# Altium PCB PCB1.PcbDoc
Units mm, origin at the board's own origin, x right, y up, seen from the top; angles counter-clockwise.
Board outline 61.5 x 59.2 mm, 2 copper layers (Top Layer, Bottom Layer), stack 0.871 mm thick; 38 components, 29 nets, 193 pads, 101 vias.
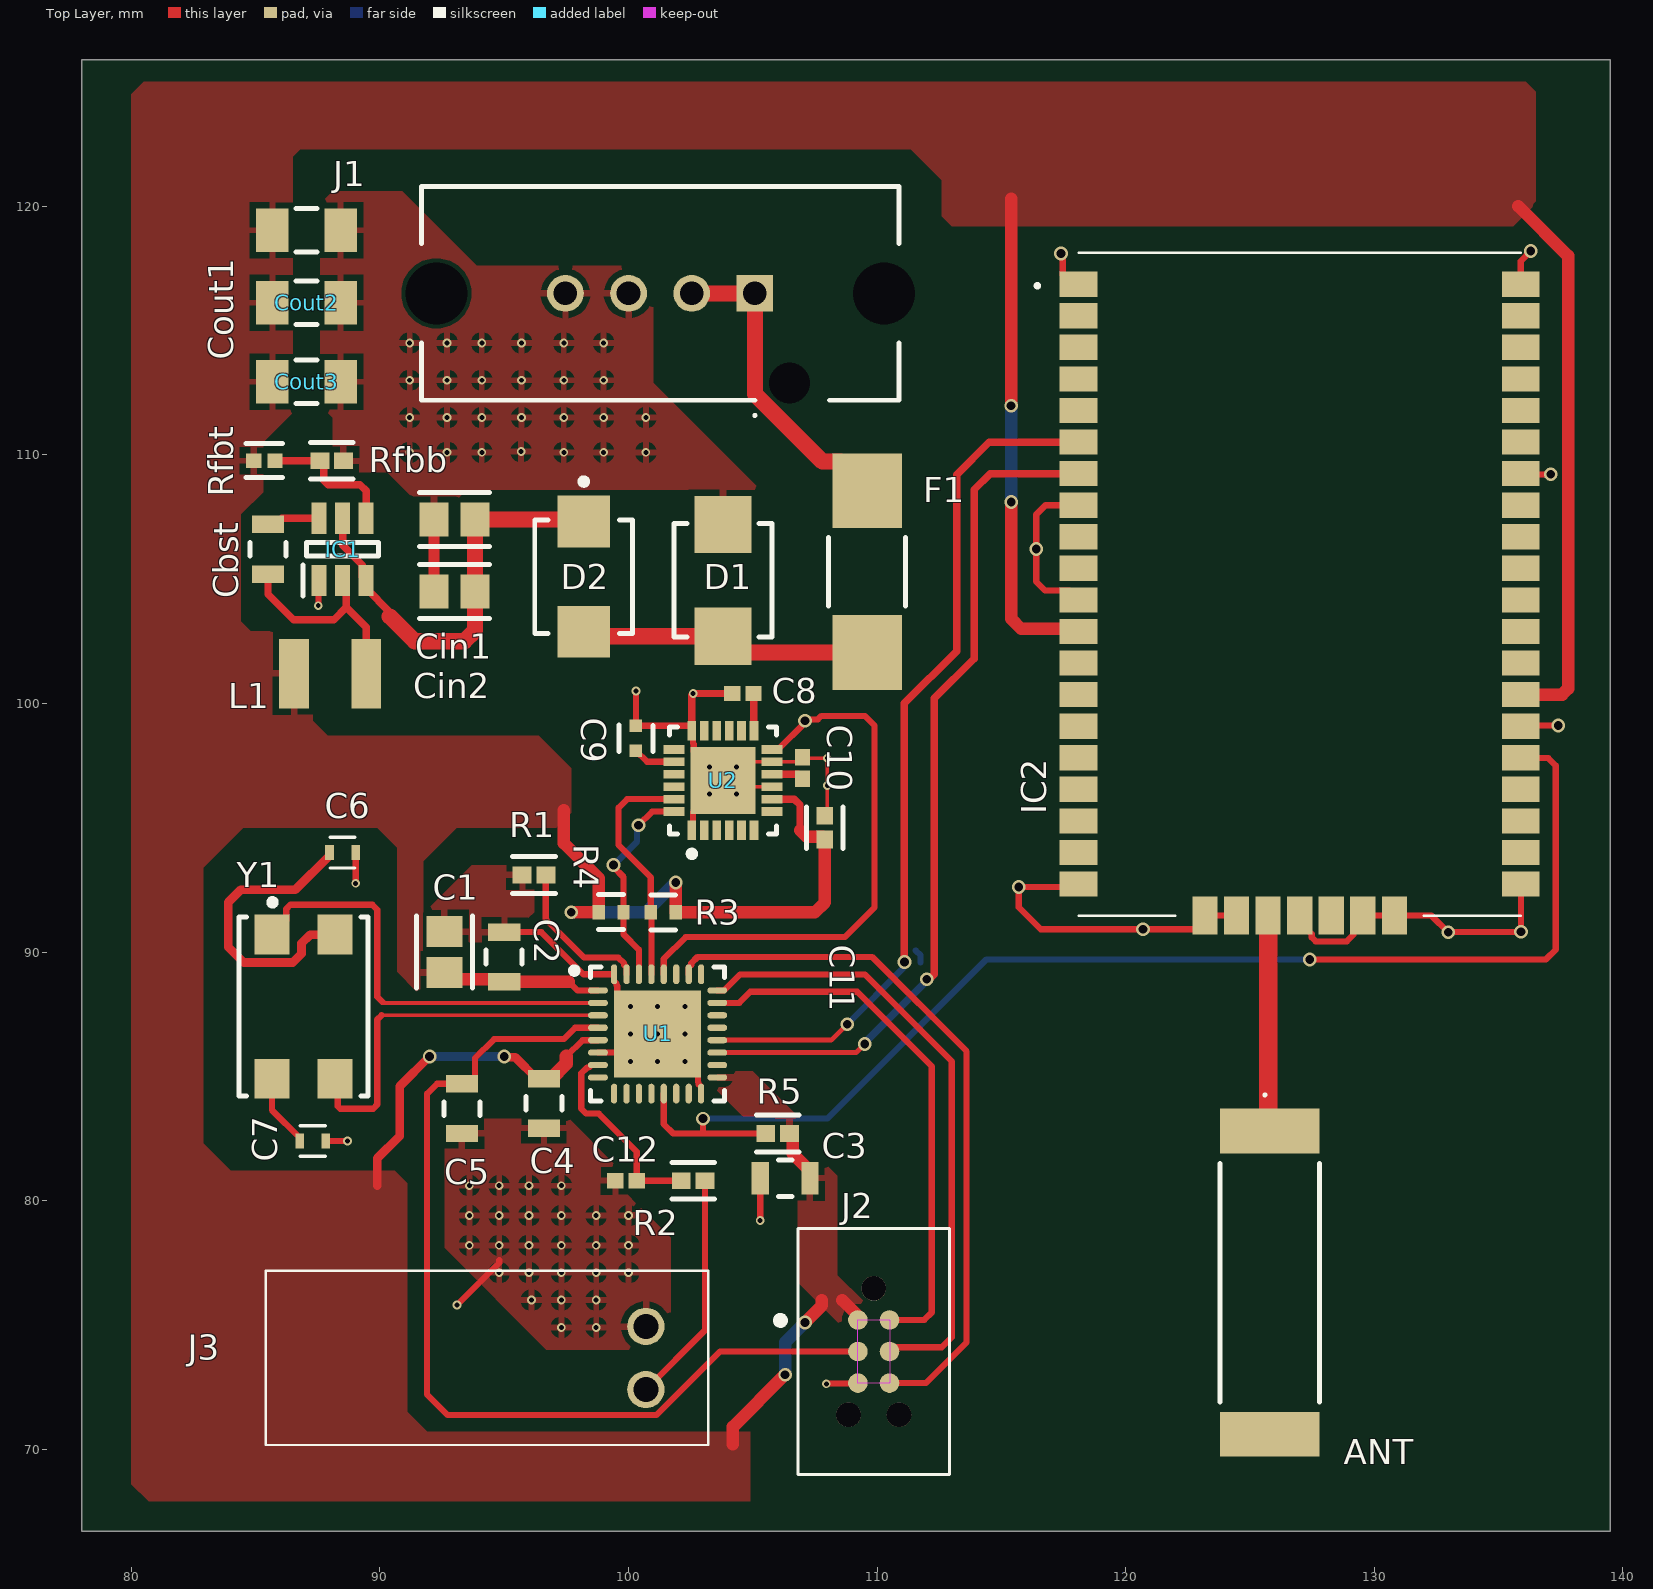
[diagram p0: Top Layer view]
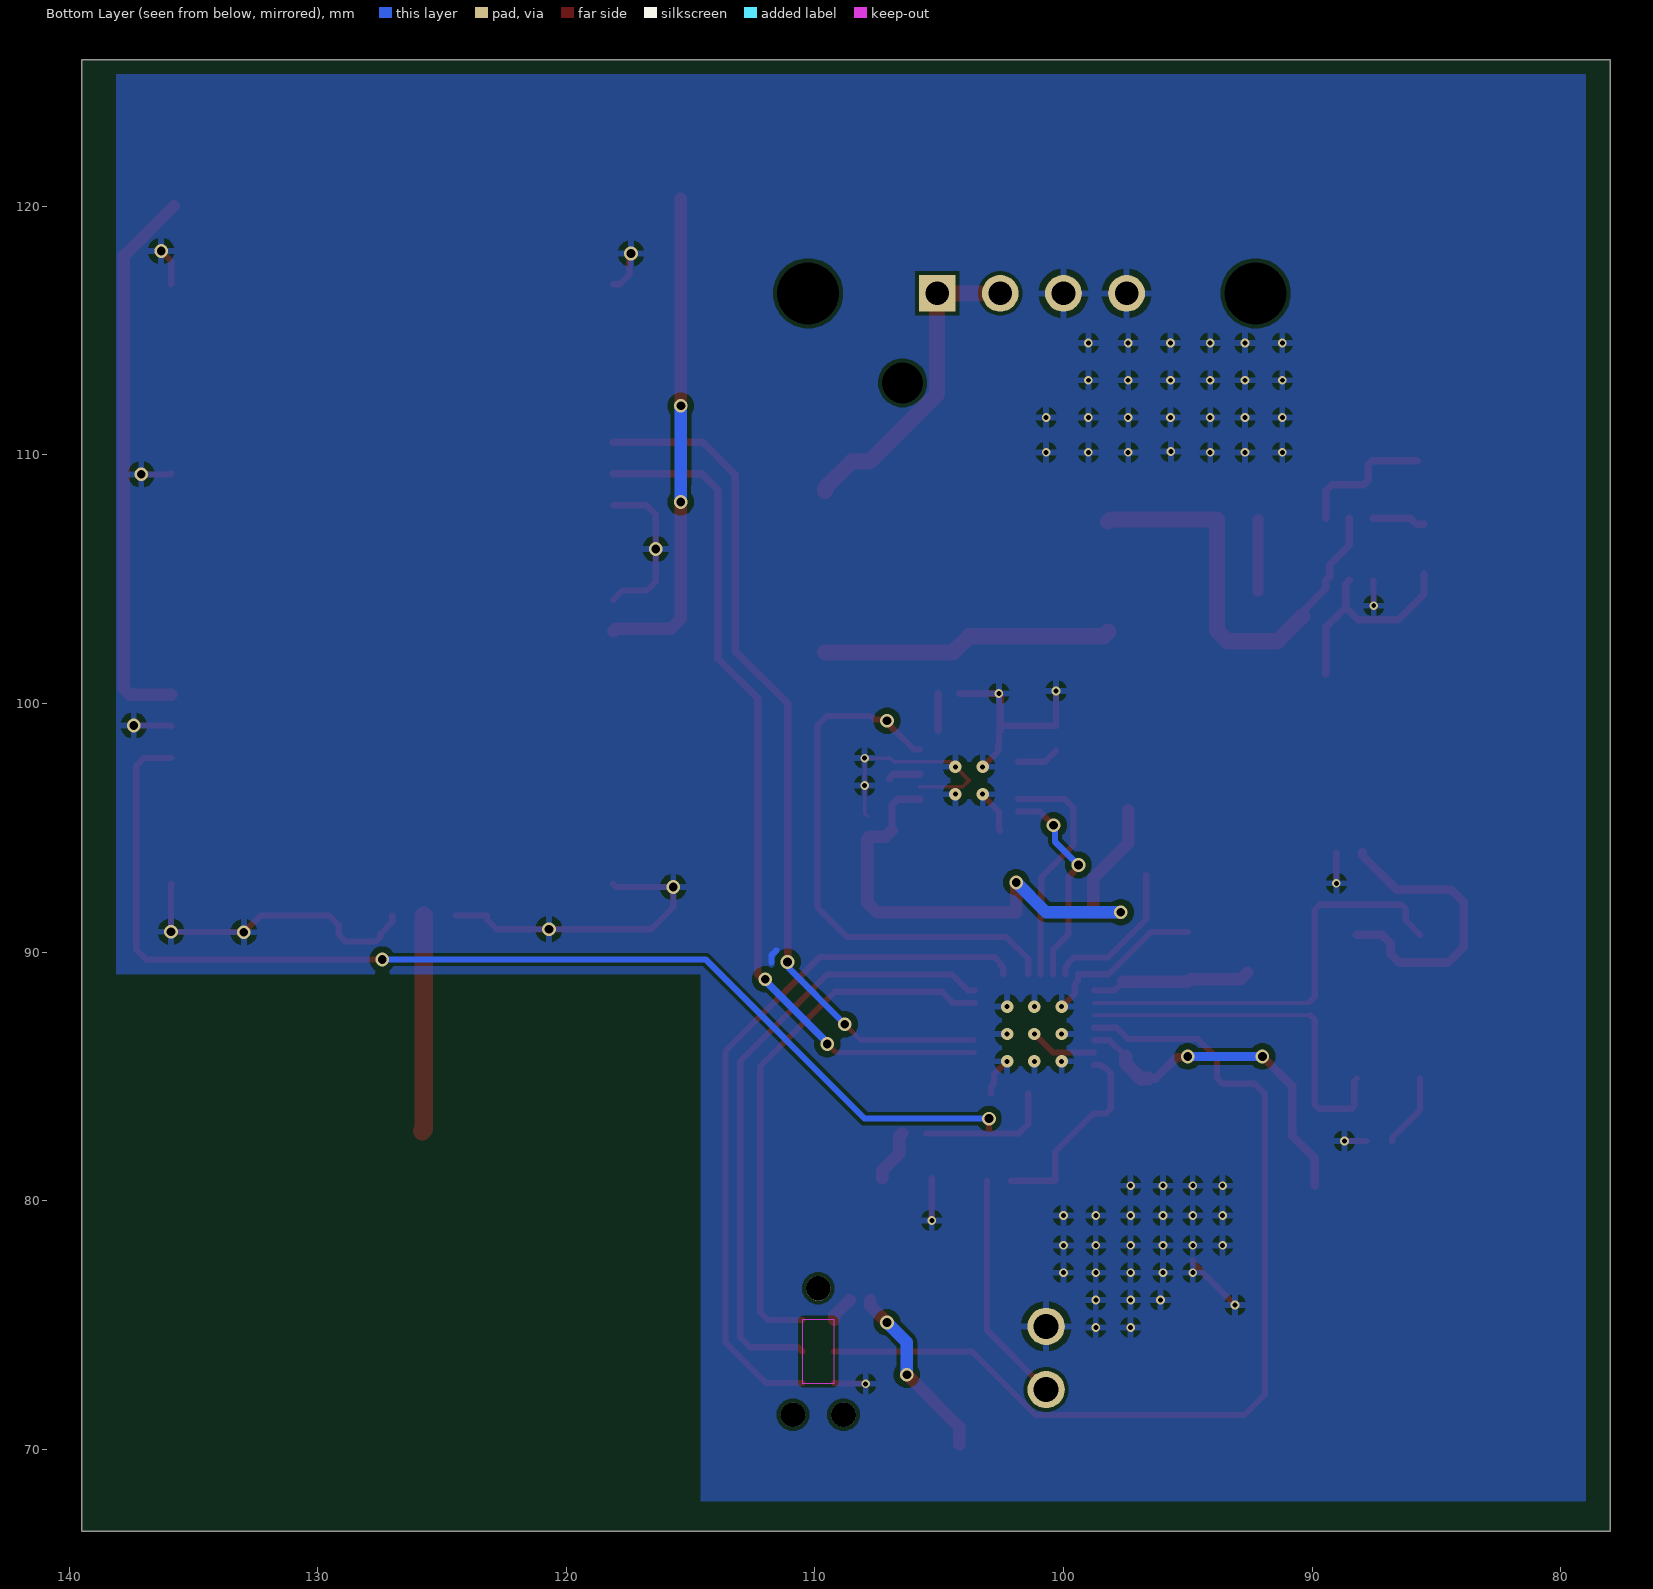
[diagram p1: Bottom Layer view, seen from below]
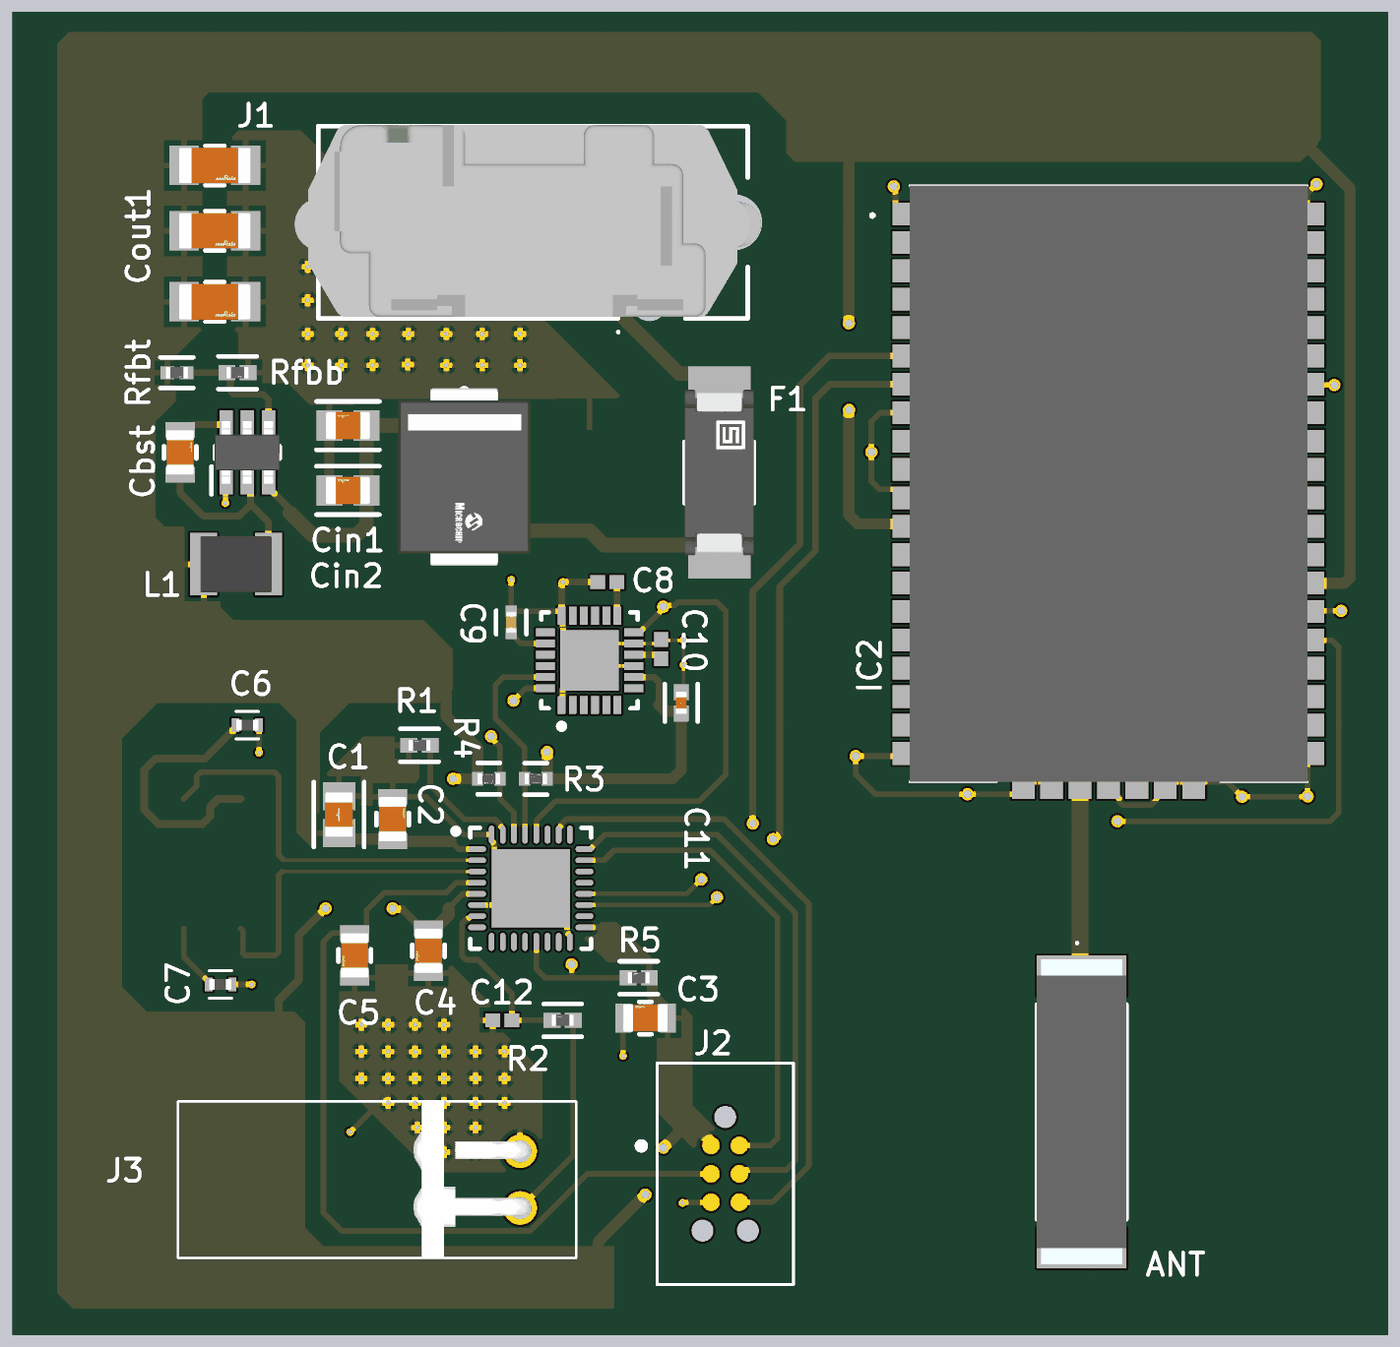
[diagram p2: 3D render of the assembled board from above, using the file's embedded part models]

## Layer stack, top to bottom
Top Solder: solder mask 0.0102, Solder Resist, Dk 3.5
Top Layer: signal copper 0.0356
Dielectric 1: dielectric 0.8, FR-4, Dk 4.5
Bottom Layer: signal copper 0.0356
Bottom Solder: solder mask 0.0102, Solder Resist, Dk 3.5

## Board outline
78,66.7 78,125.9 139.5,125.9 139.5,66.7

## Design rules (kind name [scope] priority, off if disabled: settings)
Clearance Clearance_1 [All] p1: gap=0.15 ignorepadtopadclearanceinfootprint=TRUE except(0.25: Arc-Arc Arc-Track Arc-Via Track-Track Track-Via Via-Via Via-Fill Via-Poly Via-Region)
Clearance [All] p2: gap=0 ignorepadtopadclearanceinfootprint=TRUE except(0.32: Arc-Arc Arc-Track Track-Track)
HoleSize [All] p1: absolutevalues=TRUE maxlimit=6.3 minlimit=0.2 maxpercent=80.000 minpercent=20.000
MinimumSolderMaskSliver [All] p1: minsoldermaskwidth=0.1
PolygonConnect [All] p1: connectstyle=Relief reliefconductorwidth=0.254 reliefentries=4 polygonreliefangle="90 Angle" airgapwidth=0.254
RoutingVias [All] p1: holewidth=0.35 width=0.55 viastyle="Through Hole" minholewidth=0.2 minwidth=0.35 maxholewidth=0.8 maxwidth=1.2
SilkToSolderMaskClearance [IsPad] p1: minsilkscreentomaskgap=0.1 clearancetoexposedcopper=TRUE
SolderMaskExpansion [All] p1: expansion=0.1 istentingtop=FALSE
SupplyNets "Schematic Supply Nets_2" [InNet('GND')] p1: voltage=0.000
SupplyNets "Schematic Supply Nets_1" [InNet('3V3')] p2: voltage=0.000
SupplyNets "Schematic Supply Nets" [InNet('VBAT')] p3: voltage=0.000
UnRoutedNet [All] p1: checkbadconnections=TRUE
Width [All] p1: maxlimit=1.5 minlimit=0.15 preferedwidth=0.25 minimp=50.000000 maximp=50.000000 favimp=50.000000
26 further rules are at their usual default settings.

## Components (designator, comment, footprint, x,y, rotation, side; value= is the part's Value field where it differs from the comment)
ANT "ANT1204F005R0915A" ANT1204F005R0915A 125.8,76.7 r270 top
C1 "2.2 uF" FP-GRM21B-0_2-e0_2_0_7-IPC_B 92.6,90 r90 top
C2 "100 nF" FP-GCE21B-0_3-MFG 95,89.8 r90 top
C3 "100 nF" FP-GCE21B-0_3-MFG 106.3,80.9 r180 top
C4 "100 nF" FP-GCE21B-0_3-MFG 96.6,83.91 r270 top
C5 "100 nF" FP-GCE21B-0_3-MFG 93.3,83.7 r270 top
C6 "CC0402JRNPO9BN240" CAPC1005X55N 88.5,94 r0 top
C7 "24 pF x2" CAPC1005X55N 87.3,82.4 r0 top
C8 "100 nF" CAPC1005X55X30NL05T10 104.6,100.4 r0 top
C9 "2n2 F" FP-CC0402-MFG 100.3,98.6 r90 top value="2.2 nF"
C10 "100 nF" CAPC1005X55X30NL05T10 107,97.4 r270 top
C11 "10 nF" FP-0402-L_1_0_0_05-W_0_5-IPC_A 107.9,95 r90 top
C12 "100 nF" CAPC1005X55X30NL05T10 99.9,80.8 r0 top
Cbst "100 nF 280 mOhm" FP-GCE21B-0_3-MFG 85.5,106.2 r90 top
Cin1 "10 uF 5.85 mOhm x2" FP-GRM21B-0_1-IPC_B 93,107.4 r180 top
Cin2 "10 uF 5.85 mOhm" FP-GRM21B-0_1-IPC_B 93,104.5 r180 top
Cout1 "22 uF 1 mOhm x3" FP-GRM319-0_15-IPC_B 87.049,119.036 r0 top
Cout2 "22uF 1 mOhm" FP-GRM319-0_15-IPC_B 87.049,116.115 r0 top
Cout3 "22uF 1 mOhm" FP-GRM319-0_15-IPC_B 87.049,112.94 r0 top
D1 "TVS" WE-TVSP_DO-214AA_Bidirectional -1166.2,1374.95 r90 top
D2 "Schottky" FP-DO-214BA-MFG 98.2,105.1 r270 top
F1 "Fuse" FP-OMF_63-MFG 109.6,105.3 r270 top
IC1 "TPS563209DDCR" SOT95P280X110-6N 88.5,106.2 r90 top
IC2 "RN2903A-I_RM105" RN2903AIRM105 127,104.8 r180 top
J1 "from battery" 13791657 105.083,116.496 r180 top
J2 "DNP" TAG_TC2030-IDC-NL 109.865,73.93 r270 top
J3 "vibration sensor" 10059401 103.2,74.94 r180 top
L1 "2.2 uH 15 mOhm" WE-PMFI_322512 88,101.2 r180 top
R1 "10 kOhm" FP-AT0402-IPC_A 96.2,93.1 r180 top
R2 "10 kOhm" FP-AT0402-IPC_A 102.6,80.8 r180 top
R3 "2.2k" FP-RT0402-MFG 101.4,91.6 r0 top value=2.2KΩ
R4 "2.2k" FP-RT0402-MFG 99.3,91.6 r180 top value=2.2KΩ
R5 "10 kOhm" FP-AT0402-IPC_A 106,82.7 r180 top
Rfbb "10 kOhm" FP-AT0402-IPC_A 88.065,109.765 r0 top
Rfbt "33.2 kOhm" FP-AF0402-IPC_B 85.35,109.765 r0 top
U1 "STM32F301K6U6" STM-UFQFPN32_L 101.172,86.704 r0 top
U2 "MPU-6050" IS-QFN-24_V 103.8,96.9 r90 top
Y1 "8 MHz" WE-XTAL_12SMX 1356.93,-1182.2 r270 top

## Footprints (in the part's own frame and the unit in brackets; to place one, negate y for a bottom-side part, rotate by r counter-clockwise, add the part's x,y. Pads: shape width x height; smd on the part's side, far side on the other; paste and mask are expansions set on the pad)
10059401 [mm]
  round 1.5 hole 1: 1(2.5,0) 2(2.5,2.54)
  silkscreen extent 0,-2.23 17.8,4.77, body extent 2.1,-2.28 7.28,4.72, height 17.7
13791657 [mm]
  rect 1.478x1.478 hole 0.95: 1(0,0)
  round 1.478 hole 0.95: 2(2.54,0) 3(5.08,0) 4(7.62,0)
  round 1.25 hole 2.5 unplated: MH1(-5.19,0) MH2(12.81,0)
  round 0.825 hole 1.65 unplated: MH3(-1.39,3.6)
  silkscreen extent -5.79,-4.3 13.41,4.96, body extent -6.37,-4.36 14.91,4.24, height 17.41
ANT1204F005R0915A [mm]
  rect 1.8x4 smd: 1(-6.1,0) 2(6.1,0)
  silkscreen extent -7.6,-2 4.8,2, body extent -6.82,-2 6.82,2, height 1.9
CAPC1005X55N [mm]
  rect 0.35x0.6 smd paste+0 mask+0.102: 1(-0.525,0) 2(0.525,0)
  silkscreen extent -0.5,-0.62 0.5,0.62, body extent -0.5,-0.25 0.5,0.25, height 0.55
CAPC1005X55X30NL05T10 [mm] "Chip Capacitor, 2-Leads, Body 1.00x0.50mm, IPC Medium Density"
  rect 0.66x0.62 smd: 1(-0.43,0) 2(0.43,0)
  body extent -0.53,-0.28 0.53,0.27, height 0.55
FP-0402-L_1_0_0_05-W_0_5-IPC_A [mm]
  rect 0.715x0.672 smd paste+0 mask+0: 1(-0.479,0) 2(0.479,0)
  silkscreen extent -0.84,-0.74 0.84,0.74, body extent -1.04,-0.54 1.04,0.54, height 0.25
FP-AF0402-IPC_B [mm]
  rect 0.615x0.572 smd paste+0 mask+0: 1(-0.429,0) 2(0.429,0)
  silkscreen extent -0.74,-0.69 0.74,0.69, body extent -0.89,-0.44 0.89,0.44, height 0.25
FP-AT0402-IPC_A [mm]
  rect 0.76x0.672 smd paste+0 mask+0: 1(-0.476,0) 2(0.476,0)
  silkscreen extent -0.86,-0.74 0.86,0.74, body extent -1.06,-0.54 1.06,0.54, height 0.25
FP-CC0402-MFG [mm]
  rect 0.5x0.5 smd paste+0 mask+0: 1(-0.5,0) 2(0.5,0)
  silkscreen extent -0.53,-0.68 0.53,0.67, body extent -0.87,-0.48 0.87,0.48, height 0.25
FP-DO-214BA-MFG [mm]
  rect 2.08x2.13 smd paste+0 mask+0: 1(-2.215,0) 2(2.215,0)
  silkscreen extent -3.95,-1.97 2.28,1.97, body extent -3.35,-2.07 3.35,2.07, height 0.25
FP-GCE21B-0_3-MFG [mm]
  rect 0.7x1.3 smd paste+0 mask+0: 1(-1,0) 2(1,0)
  silkscreen extent -0.28,-0.72 0.28,0.72, body extent -1.45,-0.82 1.45,0.82, height 0.25
FP-GRM21B-0_1-IPC_B [mm]
  rect 1.158x1.362 smd paste+0 mask+0: 1(-0.827,0) 2(0.827,0)
  silkscreen extent -1.41,-1.08 1.41,1.08, body extent -1.66,-0.93 1.66,0.93, height 0.25
FP-GRM21B-0_2-e0_2_0_7-IPC_B [mm]
  rect 1.255x1.456 smd paste+0 mask+0: 1(-0.826,0) 2(0.826,0)
  silkscreen extent -1.45,-1.13 1.45,1.13, body extent -1.7,-0.98 1.7,0.98, height 0.25
FP-GRM319-0_15-IPC_B [mm]
  rect 1.306x1.758 smd paste+0 mask+0: 1(-1.376,0) 2(1.376,0)
  silkscreen extent -0.42,-0.88 0.42,0.88, body extent -2.28,-1.13 2.28,1.13, height 0.25
FP-OMF_63-MFG [mm]
  rect 3x2.8 smd paste+0 mask+0: 1(-3.25,0) 2(3.25,0)
  silkscreen extent -1.38,-1.55 1.38,1.55, body extent -4.85,-1.65 4.85,1.65, height 0.25
FP-RT0402-MFG [mm]
  rect 0.5x0.6 smd paste+0 mask+0: 1(-0.5,0) 2(0.5,0)
  silkscreen extent -0.5,-0.71 0.5,0.7, body extent -0.85,-0.4 0.85,0.4, height 0.25
IS-QFN-24_V [mm] "QFN, 24-Leads, Body 4x4mm, Pitch 0.5mm, Thermal Pad 2.7x2.6mm"
  rect 0.8x0.35 smd: 1(-2,1.25) 2(-2,0.75) 3(-2,0.25) 4(-2,-0.25) 5(-2,-0.75) 6(-2,-1.25) 13(2,-1.25) 14(2,-0.75) 15(2,-0.25) 16(2,0.25) 17(2,0.75) 18(2,1.25)
  rect 0.35x0.85 smd mask+0.102: 7(-1.25,-1.975) 8(-0.75,-1.975) 9(-0.25,-1.975) 10(0.25,-1.975) 11(0.75,-1.975) 12(1.25,-1.975) 19(1.25,1.975) 20(0.75,1.975) 21(0.25,1.975) 22(-0.25,1.975) 23(-0.75,1.975) 24(-1.25,1.975)
  rect 2.7x2.6 smd: 25(0,0)
  silkscreen extent -3.07,-2.15 2.15,2.15, body extent -2,-2 2,2, height 0.95
RN2903AIRM105 [mil]
  rect 60x40 smd: 1(350,-475) 2(350,-425) 3(350,-375) 4(350,-325) 5(350,-275) 6(350,-225) 7(350,-175) 8(350,-125) 9(350,-75) 10(350,-25) 11(350,25) 12(350,75) 13(350,125) 14(350,175) 15(350,225) 16(350,275) 17(350,325) 18(350,375) 19(350,425) 20(350,475) 28(-350,475) 29(-350,425) 30(-350,375) 31(-350,325) 32(-350,275) 33(-350,225) 34(-350,175) 35(-350,125) 36(-350,75) 37(-350,25) 38(-350,-25) 39(-350,-75) 40(-350,-125) 41(-350,-175) 42(-350,-225) 43(-350,-275) 44(-350,-325) 45(-350,-375) 46(-350,-425) 47(-350,-475)
  rect 40x60 smd: 21(150,525) 22(100,525) 23(50,525) 24(0,525) 25(-50,525) 26(-100,525) 27(-150,525)
  silkscreen extent -350,-525 417,525, body extent -350,-525 350,525, height 135
SOT95P280X110-6N [mm]
  rect 1.25x0.6 smd: 1(-1.25,0.95) 2(-1.25,0) 3(-1.25,-0.95) 4(1.25,-0.95) 5(1.25,0) 6(1.25,0.95)
  silkscreen extent -1.88,-1.45 0.28,1.6, body extent -1.4,-1.45 1.4,1.45, height 0.97
STM-UFQFPN32_L [mm] "QFN, 32-Leads, Body 5.1x5.1mm, Pitch 0.5mm, Thermal Pad 3.5x3.5mm, IPC High Density"
  oval 0.8x0.25 smd: 1(-2.4,1.75) 2(-2.4,1.25) 3(-2.4,0.75) 4(-2.4,0.25) 5(-2.4,-0.25) 6(-2.4,-0.75) 7(-2.4,-1.25) 8(-2.4,-1.75) 17(2.4,-1.75) 18(2.4,-1.25) 19(2.4,-0.75) 20(2.4,-0.25) 21(2.4,0.25) 22(2.4,0.75) 23(2.4,1.25) 24(2.4,1.75)
  oval 0.25x0.8 smd: 9(-1.75,-2.4) 10(-1.25,-2.4) 11(-0.75,-2.4) 12(-0.25,-2.4) 13(0.25,-2.4) 14(0.75,-2.4) 15(1.25,-2.4) 16(1.75,-2.4) 25(1.75,2.4) 26(1.25,2.4) 27(0.75,2.4) 28(0.25,2.4) 29(-0.25,2.4) 30(-0.75,2.4) 31(-1.25,2.4) 32(-1.75,2.4)
  rect 3.5x3.5 smd: 33(0,0)
  silkscreen extent -3.47,-2.7 2.7,2.7, body extent -2.55,-2.55 2.55,2.55, height 0.6
TAG_TC2030-IDC-NL [mil]
  round 30.98 smd paste-39.37: 1(-50,-25) 2(-50,25) 3(0,-25) 4(0,25) 5(50,-25) 6(50,25)
  round 39.02 hole 39.02 unplated: ""(-100,0) ""(100,40) ""(100,-40)
  Keep-Out Layer region: 50,-25.03 -50.06,-25.03 -50.06,25 50,25
  silkscreen extent -195,-154 195,120
WE-PMFI_322512 [mm] "SMT Power Inductor, body 3.20 x 2.50 mm"
  rect 1.2x2.8 smd: 1(-1.45,0) 2(1.45,0)
  body extent -1.6,-1.25 1.6,1.25, height 1.2
WE-TVSP_DO-214AA_Bidirectional [mm] "Power TVS Diode, 2-Leads. body 4.32x3.62mm"
  rect 2.3x2.3 smd: 1(-1272.25,-1270) 2(-1267.75,-1270)
  silkscreen extent -1272.28,-1271.97 -1267.72,-1268.03, body extent -1272.7,-1271.81 -1267.3,-1268.19, height 2.38
WE-XTAL_12SMX [mm] "Quartz Crystal, size 12SMX, body 7.5x5.2mm"
  rect 1.6x1.4 smd: 1(-1272.9,-1271.27) 2(-1267.1,-1271.27) 3(-1267.1,-1268.73) 4(-1272.9,-1268.73)
  silkscreen extent -1274.32,-1272.6 -1266.4,-1267.4, body extent -1273.5,-1272.5 -1266.5,-1267.5, height 1.2

## Part data
ANT: "Antenna", Manufacturer_Name="Yageo Group", Mouser Part Number=603-ANT1204F005R0915, Arrow Part Number=ANT1204F005R0915A, Arrow Price/Stock=https://www.arrow.com/en/products/ant1204f005r0915a/yageo, Datasheet Link=https://eu.mouser.com/datasheet/2/447/datasheet_pulse_915mhz_1204_chip_antenna_type05_an-2903025.pdf, Height=1.8mm, Manufacturer_Part_Number=ANT1204F005R0915A, Mouser Price/Stock=https://www.mouser.co.uk/ProductDetail/PulseLarsen-Antennas/ANT1204F005R0915A?qs=gt1LBUVyoHnk%2Fihas5MohQ%3D%3D
C1: library part CMP-06035-063309-1, "CAP CER 2.2UF 100V X7T 0805"
C2 C3 C4 C5 Cbst: library part CMP-06035-010744-1, "Ceramic Capacitor 100nF ±20% 100V X7R 0805"
C6: "24 pF Â±5% 50V Ceramic Capacitor C0G, NP0 0402 (1005 Metric)", Package="0402 Yageo", Check_prices=https://www.snapeda.com/parts/CC0402JRNPO9BN240/Yageo/view-part/?ref=eda, MF=Yageo, MP=CC0402JRNPO9BN240, SnapEDA_Link=https://www.snapeda.com/parts/CC0402JRNPO9BN240/Yageo/view-part/?ref=snap
C7: library part CC0402JRNPO9BN240, "24 pF Â±5% 50V Ceramic Capacitor C0G, NP0 0402 (1005 Metric)", Package="0402 Yageo", Check_prices=https://www.snapeda.com/parts/CC0402JRNPO9BN240/Yageo/view-part/?ref=eda, MF=Yageo, MP=CC0402JRNPO9BN240, SnapEDA_Link=https://www.snapeda.com/parts/CC0402JRNPO9BN240/Yageo/view-part/?ref=snap
C8 C10 C12: library part CMP-2008-03089-1, Manufacturer=Kemet, Part Number=C0402C104Z8VACTU
C9: library part CMP-03422-001301-1, "CAP CER 2200PF 10V X7R 0402", Capacitance="2.2 nF", Manufacturer=YAGEO, Manufacturer Part Number=CC0402MRX7R6BB222, Package=CC0402, Temperature="-55°C to +125°C", Temperature Characteristic=X7R, Temperature Coefficient=30ppm/°C, Temperature Range High=+125°C, Temperature Range Low=-55°C, Tolerance=0.2, Voltage Rating="10 V", Automotive=No, Automotive Grade=NA, Category=Cap, ComponentLink2Description=Datasheet, ComponentLink2URL=http://www.yageo.com/documents/recent/UPY-GP_NP0_16V-to-50V_16.pdf, Device Class L1="Passive Components", Device Class L2=Capacitors, Device Class L3="Ceramic Capacitors", Digikey Description="CAP CER 2200PF 10V X7R 0402", Footprint Url=http://www.yageo.com/exep/pages/download/literatures/UPY-C_GEN_24.pdf, Height=0.55mm, Ipc Land Pattern Name=CAPC10050X50, Lead Free=Yes, Material=Ceramic, Mouser Description="Multilayer Ceramic Capacitors MLCC - SMD/SMT 2.2nF 10V X7R 20%", Octopart=https://octopart.com/cc0402mrx7r6bb222-yageo-71334383, RoHS=TRUE
C11: library part CMP-14477-001757-2, "None"
Cin1 Cin2: library part CMP-2007-03502-2, "Chip Multilayer Ceramic Capacitors for General Purpose, 0805, 10uF, X6S, 22%, 20%, 10V", Capacitance=10uF, Case Code (Imperial)=0805, Case Code (Metric)=2012, Dielectric=X6S, Max Operating Temperature=105°C, Min Operating Temperature=-55°C, Package Quantity=3000, Tolerance=20%, Voltage Rating=10V, Case/Package=0805, Construction=Flat, Depth=1.25mm, Height=1.25mm, Length=2mm, Mount="Surface Mount", Packaging="Tape and Reel", Radiation Hardening=No, Series=GRM, Termination=SMD/SMT, Thickness=0.053inch, Voltage Rating (DC)=10V, Width=1.25mm
Cout1 Cout2 Cout3: library part CMP-06035-054235-1, "Chip Multilayer Ceramic Capacitors for General Purpose, 1206, 22uF, X5R, 15%, 10%, 16V", Capacitance=22uF, Dielectric=X5R, Tolerance=10%, Voltage Rating (DC)=16V, Length=3.2mm, Thickness=850um, Width=1.6mm
D1: library part CMP-03913-73414981-2, "TVS diode [Würth Elektronik] 824521181 TVS diode", Breakdown Voltage=21.05V, Clamping Voltage=29.2V, Leakage Current=1µA, Max Operating Temperature=150°C, Min Operating Temperature=-65°C, Peak Pulse Power=600W, Reverse Standoff Voltage=18V, Height=2.4mm, Length=4.32mm, Max Breakdown Voltage=21.05V, Number of Pins=2, Packaging="Cut Tape", Polarity=Bidirectional, REACH SVHC=Unknown, RoHS=Compliant, Width=3.62mm
D2: library part CMP-00252-99180384-1, "HSM160JE3/TR13 Schottky 1.0A, 60V, Vf=0.60V Smcj (Do-214Ab) Rohs Compliant: Yes", Average Rectified Current=1A, Capacitance=53pF, Forward Voltage=690mV, Max Forward Surge Current (Ifsm)=50A, Max Junction Temperature (Tj)=175°C, Max Repetitive Reverse Voltage (Vrrm)=60V, Min Operating Temperature=-55°C, Peak Reverse Current=100µA, Element Configuration=Single, Forward Current=1A, Height=3.3mm, Max Operating Temperature=175°C, Max Reverse Voltage (DC)=60V, Mount="Surface Mount", NexarPartId=99180384, Number of Pins=2, Packaging="Tape and Reel", Peak Non-Repetitive Surge Current=50A, Radiation Hardening=No, Reverse Voltage=60V, RoHS=Compliant, Schedule B=8541100080
F1: library part CMP-26293-000004-1, "FUSE BOARD MNT 5A 63VAC/VDC 2SMD", Ambient Temperature Range High=+125°C, Ambient Temperature Range Low=-40°C, Fuse Current=5A, Fuse Voltage Drop=140mV, Manufacturer="Schurter Inc", Manufacturer Part Number=3402.0017.11, Max Fuse Ac Voltage=63V, Package=OMF_63, Automotive=No, Category=Fuse, ComponentLink2Description=Datasheet, ComponentLink2URL=https://www.schurter.com/en/datasheet/typ_OMF_63.pdf, Device Class L1="Circuit Protection", Device Class L2=Fuses, Device Class L3=unset, Digikey Description="FUSE BOARD MNT 5A 63VAC/VDC 2SMD", Fuse Blow Speed=Fast, Fuse I2T=2.9A2Sec, Height=2.6mm, Lead Free=Yes, Max Fuse Dc Voltage=63V, Mouser Description="Surface Mount Fuses OMF 63V 5A", Octopart=https://octopart.com/3402.0017.11-schurter-563471, RoHS=TRUE, Voltage Rating=63V
IC1: library part CMP-031-00007-1, "17 V Input", Manufacturer_Name="Texas Instruments", Mouser Part Number=595-TPS563209DDCR, Arrow Part Number=TPS563209DDCR, Arrow Price/Stock=https://www.arrow.com/en/products/tps563209ddcr/texas-instruments.html?utm_currency=USD&region=nac, Datasheet Link=http://www.ti.com/lit/gpn/tps563209, Design Item ID=TPS563209DDCR, Height=1.1mm, Manufacturer_Part_Number=TPS563209DDCR, Mouser Price/Stock=https://www.mouser.co.uk/ProductDetail/Texas-Instruments/TPS563209DDCR?qs=bT6MOr62zwIer%2FLlyIAhvQ%3D%3D, Source=SamacSys.SchLib
IC2: "Integrated Circuit", Arrow Part Number=RN2903A-I/RM105, Manufacturer_Name=Microchip, Mouser Part Number=579-RN2903A-I/RM105, Arrow Price/Stock=https://www.arrow.com/en/products/rn2903a-irm105/microchip-technology?utm_currency=USD&region=nac, Datasheet Link=http://ww1.microchip.com/downloads/en/DeviceDoc/RN2903-LoRa-Technology-Transceiver-Module-Data-Sheet-DS50002390G.pdf, Height=3.34mm, Manufacturer_Part_Number=RN2903A-I/RM105, Mouser Price/Stock=https://www.mouser.co.uk/ProductDetail/Microchip-Technology/RN2903A-I-RM105?qs=PqoDHHvF648ggy%252BxQbPa3A%3D%3D
J1: library part 1379165-7, "Connector", Manufacturer_Name="TE Connectivity", Mouser Part Number=571-1379165-7, Arrow Part Number=1379165-7, Arrow Price/Stock=https://www.arrow.com/en/products/1379165-7/te-connectivity, Datasheet Link=https://www.mouser.de/datasheet/2/418/6/ENG_CD_1379165_D5-2005008.pdf, Height=18.8mm, Manufacturer_Part_Number=1379165-7, Mouser Price/Stock=https://www.mouser.co.uk/ProductDetail/TE-Connectivity-AMP/1379165-7?qs=6Z%252BHCgJKjncEStSYB7eeFQ%3D%3D
J2: library part CMP-009-000001-1, "CABLE ADAPTER 6 POS", Package=None, Availability=Unavailable, Component Type=Standard, Design Item ID=TC2030-IDC-NL, MP=TC2030-IDC-NL, Pin Count=6, Price=None, Source=TC2030-IDC-NL.SchLib
J3: library part CMP-002-00073-1, "Connector", Arrow Part Number=1005940-1, Manufacturer_Name="TE Connectivity", Mouser Part Number=824-1005940-1, Arrow Price/Stock=https://www.arrow.com/en/products/1005940-1/te-connectivity, Datasheet Link=https://www.te.com/en/product-1005940-1.html, Design Item ID=1005940-1, Height=3mm, Manufacturer_Part_Number=1005940-1, Mouser Price/Stock=https://www.mouser.co.uk/ProductDetail/Measurement-Specialties/1005940-1?qs=nNyf8ckWk3QltpLrvr%2FUIQ%3D%3D, Source=SamacSys.SchLib
L1: library part CMP-03913-162350128-1, "Power Ind, 2.2UH, 4.1A, Shielded, 1210 Rohs Compliant: Yes"
R1 R2 R5 Rfbb: library part CMP-03412-043449-1, "Thin Film Chip Resistors Automotive Grade 10kΩ 0.5% 25ppm/°C 0402", Case Code (Imperial)=0402, Case Code (Metric)=1005, Max Operating Temperature=155°C, Max Power Dissipation=63mW, Min Operating Temperature=-55°C, Ratings=AEC-Q200, Resistance=10kR, Resistor Type="Thin Film", Temperature Coefficient=25ppm/°C, Tolerance=0.5%, Case/Package=0402, Features="Moisture Resistant", Height=0.014inch, Length=0.039inch, Number of Terminations=2, Packaging="Cut Tape", RoHS Compliant=Yes, Series=AT, Width=0.02inch
R3 R4: library part CMP-03412-019720-1, "RES SMD 2.2K OHM 0.1% 1/16W 0402", Manufacturer=Yageo, Manufacturer Part Number=RT0402BRE072K2L, Package=RT0402, Power Rating=0.063W, Resistance=2.2KΩ, Temperature="-55°C to +155°C", Temperature Coefficient="50 ppm/°C", Temperature Range High=+155°C, Temperature Range Low=-55°C, Tolerance=0.001, Voltage Rating=50V, Automotive=No, Category=Res, ComponentLink2Description=Datasheet, ComponentLink2URL=http://www.yageo.com/documents/recent/PYu-RT_1-to-0.01_RoHS_L_9.pdf, Composition="Thin Film", Device Class L1="Passive Components", Device Class L2=Resistors, Device Class L3="Chip SMD Resistors", Digikey Description="RES SMD 2.2K OHM 0.1% 1/16W 0402", Footprint Url=http://www.yageo.com/exep/pages/download/literatures/PYu-R_Mount_10.pdf, Height=0.35mm, Ipc Land Pattern Name=RESC10050X30, Lead Free=Yes, Octopart=https://octopart.com/rt0402bre072k2l-yageo-1445889, RoHS=TRUE, Series=RT
Rfbt: library part CMP-03412-045433-1, "Anti-Sulfurated Chip Resistors Automotive Grade 33.2kΩ 1% 100ppm/°C 0402", Case/Package=0402, Max Operating Temperature=155°C, Max Power Dissipation=63mW, Min Operating Temperature=-55°C, Resistance=33.2kR, Resistor Type="Thick Film", Temperature Coefficient=100ppm/°C, Tolerance=1%, Features="Moisture Resistant", Height=0.015inch, Length=0.039inch, Number of Terminations=2, Packaging="Tape and Reel", RoHS Compliant=Yes, Series=AF, Width=0.02inch
U1: library part CMP-0537-00004-1, "ARM Cortex-M4 32-bit MCU, 32 KB Flash, 16 KB Internal RAM, 24 I/Os, 32-Pin UFQFPN, -40 to 85 degC, Tray", I/Os (High Current)=24, Operating Frequency(F) (Processor speed) (MHz)=72, Package Description="32-Pin Ultra Thin Fine Pitch Quad Flat No-Lead, 5 x 5 x 0.6 mm Body, 0.5 mm Pitch, Exposed Pad 3.5 x 3.5 mm", Package Reference=UFQFPN32, Supply Voltage(Vcc) min (V)=2, ComponentLink1Description="Manufacturer URL", ComponentLink1URL=http://www.st.com/, ComponentLink2Description=Datasheet, ComponentLink2URL=http://www.st.com/st-web-ui/static/active/en/resource/technical/document/datasheet/DM00093332.pdf, Core="ARM Cortex-M4", D/A Converter=1, DatasheetVersion="Rev. 6", FLASH Size (Prog) (kB)=32, Internal RAM Size (kB)=16, Mounting Technology="Surface Mount", Packing=Tray
U2: library part CMP-1753-00002-2, "3-Axis Gyroscope, Accelerometer and a Digital Motion Processor(TM) (DMP), 2.375 to 3.46 V, -40 to 85 degC, 24-Pin QFN, RoHS, Tape and Reel", Manufacturer=InvenSense, Standard Package=5,000, Category=Sensors,Transducers, Datasheet URL=http://datasheet.octopart.com/MPU-6050-InvenSense-datasheet-14421344.pdf, Datasheet Version="Rev. 3.3, 05/2012", Dynamic Catalog=MPU-6000™Series, Family=Multifunction, Featured Product=MPU-60506-Axis,IntegratedI²CSolution, Manufacturer URL=http://www.invensense.com/, Online Catalog=MPU-6000™Series, Other Names="1428-1007-2 / MPU6050", Output Type=Digital, Sensor Type=MotionTracking, Unit PriceUSD=Digital
Y1: library part CMP-03913-116855642-2, "WE-XTAL Quartz Crystal", Frequency=8MHz, Max Operating Temperature=70°C, Min Operating Temperature=-20°C, Height=1.4mm, Length=7mm, Width=5mm

## Via types
v1: diameter 0.35, hole 0.2, Top Layer to Bottom Layer, 62 vias
v2: diameter 0.55, hole 0.35, Top Layer to Bottom Layer, 26 vias
v3: diameter 0.5, hole 0.2, Top Layer to Bottom Layer, 13 vias

## Nets (pads, with @x,y where several pads share a name; then routed paths per layer and width w, separated by ;. In a path a pad name is that pad's centre, name@x,y a point inside that pad or via, vN(x,y) a via of type N, cw(c..) or ccw(c..) an arc to the next point about the centre after c; other vN are vias at no path point)
3V3: C1.1 C2.1 C3.1 C4.1 C11.1 Cout1.1 Cout2.1 Cout3.1 IC2.12 IC2.34 J2.1 L1.2 R3.2 R4.2 R5.1 Rfbt.1 U1.1 U1.5 U1.17 U2.8 | length 96.8
  Top Layer w0.25: 97.5,85.8 98.154,86.454 U1.5 ; 97.6,88.8 97.946,88.454 U1.1
  Top Layer w0.3: U2.8 106.67,96.15 106.9,95.92 106.9,94.9
  Top Layer w0.35: 89.9,80.6 89.9,81.7 90.8,82.6 90.8,84.6 v2(92,85.8) ; v2(95,85.8) 95.038,85.762 95.448,85.762 96.3,84.91 C4.1
  Top Layer w0.5: C1.1 92.874,88.9 94.9,88.9 C2.1 97.6,88.8 ; 97.4,95.7 97.4,94.375 98.8,92.975 R4.2 v2(97.7,91.6) ; v2(101.9,92.8) R3.2 107.5,91.6 107.9,92 C11.1 107.9,94.543 107.814,94.629 107.171,94.629 106.9,94.9 ; 104.2,70.2 104.2,70.9 v2(106.3,73) ; R5.1 106.52,82.7 106.606,82.614 106.606,81.894 107.3,81.2 C3.1 ; v2(107.1,75.1) 107.78,75.78 107.78,76 ; 108.6,76 109.23,75.37 J2.1 ; v2(115.391,111.977) 115.4,111.986 115.4,120.3 ; v2(115.4,108.1) 115.4,103.4 115.8,103 118.005,103 IC2.12 ; 135.8,120 137.8,118 137.8,100.595 137.56,100.355 IC2.34
  Top Layer w0.55: C4.1 96.9,84.91 97.5,85.51 97.5,85.8
  Bottom Layer w0.35: v2(92,85.8) v2(95,85.8)
  Bottom Layer w0.5: v2(97.7,91.6) 100.7,91.6 v2(101.9,92.8) ; v2(106.3,73) 106.3,74.3 v2(107.1,75.1) ; v2(115.391,111.977) 115.391,108.809 115.4,108.8 v2(115.4,108.1)
BOOT0: R1.1 U1.31 | length 6.1
  Top Layer w0.25: R1.1 96.676,91.324 98.221,89.779 99.588,89.779 99.822,89.545 99.822,89.479 99.922,89.379 U1.31
GND: C1.2 C2.2 C3.2 C4.2 C5.2 C6.2 C7.2 C8.1 C9.2 C10.1 C11.2 C12.1 Cin1.2 Cin2.2 Cout1.2 Cout2.2 Cout3.2 D1.2 IC1.1 IC2.1 IC2.8 IC2.11 IC2.20 IC2.21 IC2.22 IC2.24 IC2.26 IC2.27 IC2.28 IC2.33 IC2.41 IC2.47 J1.3 J1.4 J2.5 J3.1 R1.2 Rfbb.2 U1.6 U1.16 U1.32 U1.33 U2.1 U2.9 U2.11 U2.18 U2.25 | length 80
  Top Layer w0.15: U2.9 104.05,96.65 U2.25 v3(104.35,97.45) 104.55,97.65 U2.11 106.82,97.65 C10.1 107.03,97.8 v1(108,97.8) v1(108,96.7) 108,95.579 C11.2
  Top Layer w0.25: v1(87.521,103.932) 87.535,103.947 87.535,104.935 IC1.1 ; C7.2 v1(88.7,82.4) ; v1(89.025,92.765) C6.2 ; v1(93.1,75.8) 94.8,77.5 94.8,77.6 ; C2.2 96.493,90.8 98.189,89.104 U1.32 99.422,88.829 99.522,88.729 99.522,88.663 99.547,88.638 99.547,88.329 v3(100.072,87.804) ; U1.6 100.422,85.954 v3(101.172,86.704) ; v1(100.3,100.5) C9.2 102.5,99.1 U2.18@102.55,99.05 ; v3(102.272,85.604) 102.797,85.079 102.797,84.77 102.822,84.745 102.822,84.679 102.922,84.579 U1.16 ; U2.1 102.6,94.95 102.6,95.65 U2.25@103.275,96.325 ; U2.18 102.6,98.85 102.6,98.386 102.625,98.361 102.625,98.075 v3(103.25,97.45) ; v1(105.3,79.2) C3.2 ; v1(107.957,72.63) 107.972,72.645 108.982,72.645 108.997,72.66 J2.5 ; v2(117.4,118.1) 117.4,118.073 117.473,118 117.473,117.248 117.856,116.865 IC2.1 ; IC2.20 117.989,92.614 v2(115.7,92.614) 115.7,91.8 116.586,90.914 v2(120.7,90.914) 122.807,90.914 123.19,91.297 IC2.21 IC2.22 ; IC2.11 117.727,104.548 116.752,104.548 116.4,104.9 v2(116.4,106.214) 116.4,107.6 116.775,107.975 IC2.8 ; IC2.24 127,91.211 127.487,90.724 127.487,90.589 127.648,90.428 128.892,90.428 129.157,90.693 129.157,91.082 IC2.26 IC2.27 132.302,91.465 v2(132.971,90.796) 132.98,90.805 135.891,90.805 v2(135.9,90.814) 135.9,92.725 IC2.28 ; IC2.33 135.919,99.114 v2(137.4,99.114) ; IC2.41 135.921,109.214 v2(137.1,109.214) ; IC2.47 135.89,117.79 v2(136.3,118.2)
  Top Layer w0.3: U2.18 102.55,99.05 102.55,100.336 102.6,100.386 v1(102.6,100.4) C8.1
  Top Layer w0.45: Cin2.2 Cin1.2
  Bottom Layer w0.25: 111.56,90.06 111.75,89.869 111.75,89.589
  other v1: 97.3,74.9 98.7,74.9 96.1,76 97.3,76 98.7,76 94.8,77.1 96,77.1 97.3,77.1 98.7,77.1 100,77.1 93.6,78.2 94.8,78.2 96,78.2 97.3,78.2 98.7,78.2 100,78.2 93.6,79.4 94.8,79.4 96,79.4 97.3,79.4 98.7,79.4 100,79.4 93.6,80.6 94.8,80.6 96,80.6 97.3,80.6 91.2,110.1 92.7,110.1 94.1,110.1 97.4,110.1 99,110.1 100.7,110.1 95.682,110.131 91.2,111.5 92.7,111.5 94.1,111.5 95.7,111.5 97.4,111.5 99,111.5 100.7,111.5 91.2,113 92.7,113 94.1,113 95.7,113 97.4,113 99,113 91.2,114.5 92.7,114.5 94.1,114.5 95.7,114.5 97.4,114.5 99,114.5
  other v3: 100.072,85.604 101.172,85.604 100.072,86.704 102.272,86.704 101.172,87.804 102.272,87.804 103.25,96.35 104.35,96.35
IMU_CPOUT: C9.1 U2.20 | length 1.7
  Top Layer w0.25: C9.1 100.75,97.65 U2.20
IMU_INT: U1.28 U2.12 | length 22.2
  Top Layer w0.25: U1.28 101.422,89.722 102.3,90.6 108.7,90.6 109.9,91.8 109.9,99.1 109.5,99.5 107.761,99.5 107.619,99.357 107.157,99.357 v2(107.1,99.3) 107.1,99.225 106.025,98.15 U2.12
IMU_REGOUT: C10.2 U2.10 | length 1.3
  Top Layer w0.3: U2.10 106.84,97.15 107,96.99 C10.2
IMU_SCL: R3.1 U1.29 U2.23 | length 9.6
  Top Layer w0.25: U1.29 100.922,91.578 R3.1 100.9,93 99.6,94.3 99.6,95.8 99.95,96.15 U2.23
IMU_SDA: R4.1 U1.30 U2.24 | length 8.5
  Top Layer w0.25: v2(99.4,93.5) 99.4,93.419 99.8,93.019 R4.1 99.8,90.713 100.422,90.091 U1.30 ; v2(100.4,95.1) 100.95,95.65 U2.24
  Bottom Layer w0.25: v2(99.4,93.5) 100.343,94.443 100.343,95.043 v2(100.4,95.1)
IMU_VDD: C8.2 U2.13 | length 1.5
  Top Layer w0.3: U2.13@105.03,98.92 C8.2
MCU_ADC: C12.2 R2.2 U1.7 | length 8.1
  Top Layer w0.25: U1.7 98.497,85.454 98.397,85.354 98.331,85.354 98.097,85.12 98.097,83.703 98.3,83.5 98.8,83.5 100.33,81.97 C12.2 R2.2
MCU_OSC1: U1.2 Y1.1 | length 17.6
  Top Layer w0.15: 90.1,88 90.146,87.954 U1.2
  Top Layer w0.254: Y1.1 86.233,91.273 86.233,91.732 86.401,91.9 89.7,91.9 89.9,91.7 89.9,88.2 90.1,88
MCU_OSC2: U1.3 Y1.3 | length 15.2
  Top Layer w0.15: 90.068,87.454 U1.3
  Top Layer w0.254: Y1.3 88.301,84.799 88.301,83.799 88.4,83.7 89.732,83.7 89.9,83.868 89.9,87.286 90.068,87.454
NetCbst_2: Cbst.2 IC1.6 | length 2.2
  Top Layer w0.3: Cbst.2 85.8,107.2 86.05,107.45 IC1.6
NRST: C5.1 J2.3 U1.4 | length 39.3
  Top Layer w0.25: U1.4 97.854,86.954 97.4,86.5 94.6,86.5 93.825,85.725 93.825,84.925 93.6,84.7 C5.1 92.3,84.7 91.9,84.3 91.9,72.2 92.725,71.375 101.125,71.375 103.68,73.93 J2.3
OSC_CAP1: C7.1 Y1.2 | length 3
  Top Layer w0.25: Y1.2 85.66,83.64 86.775,82.525 C7.1
OSC_CAP2: C6.1 Y1.4 | length 12
  Top Layer w0.35: C6.1 87.975,93.875 86.6,92.5 84.4,92.5 83.9,92 83.9,90.2 84.525,89.575 86.495,89.575 86.847,89.928 86.847,90.347 87.2,90.7 Y1.4
RF_RX: IC2.7 U1.19 | length 34.7
  Top Layer w0.2: U1.19 109.154,85.954 v2(109.5,86.3)
  Top Layer w0.3: v2(112,88.9) 112.1,88.9 112.3,89.1 112.3,100.2 113.9,101.8 113.9,108.6 114.545,109.245 IC2.7
  Bottom Layer w0.3: v2(109.5,86.3) 109.5,86.35 112,88.85 v2(112,88.9)
RF_TX: IC2.6 U1.20 | length 34.9
  Top Layer w0.2: U1.20 108.154,86.454 v2(108.8,87.1)
  Top Layer w0.3: v2(111.1,89.6) 111.1,100 113.2,102.1 113.2,109.2 114.515,110.515 IC2.6
  Bottom Layer w0.25: v2(108.8,87.1) 111.043,89.343 111.043,89.543 v2(111.1,89.6)
SW: Cbst.1 IC1.2 L1.1 | length 8.7
  Top Layer w0.3: Cbst.1 85.5,104.4 86.543,103.357 88.137,103.357 88.65,103.87 ; IC1.2 88.65,104.8 88.65,103.87 ; L1.1 89.45,103.07 88.65,103.87
SWCLK: J2.4 U1.24 | length 25
  Top Layer w0.25: U1.24 103.847,88.454 104.493,89.1 109.5,89.1 113,85.6 113,74.5 112.605,74.105 110.675,74.105 J2.4
SWDIO: J2.2 U1.23 | length 21.8
  Top Layer w0.25: U1.23 104.454,87.954 104.9,88.4 109.2,88.4 112.2,85.4 112.2,75.5 111.9,75.2 J2.2
SWO: J2.6 U1.26 | length 28.7
  Top Layer w0.25: U1.26 102.422,89.379 102.522,89.479 102.522,89.545 102.777,89.8 109.8,89.8 113.6,86 113.6,74.3 111.96,72.66 J2.6
TRAN_RESET: IC2.32 R5.2 U1.13 | length 52.2
  Top Layer w0.25: U1.13 101.422,83.078 101.8,82.7 103,82.7 ; v2(103,83.3) 103,82.7 ; R5.2@105.48,82.7 R5.2 103,82.7 ; v2(127.4,89.7) 136.9,89.7 137.3,90.1 137.3,97.5 137,97.8 135.905,97.8 IC2.32
  Bottom Layer w0.25: v2(103,83.3) 108,83.3 114.4,89.7 v2(127.4,89.7)
TRANS_ANT: ANT.1 IC2.23 | length 8.7
  Top Layer w0.75: IC2.23 125.73,82.87 ANT.1
V_TVS: D1.1 D2.2 F1.2 | length 11.7
  Top Layer w0.65: D2.2 98.385,102.7 D1.1 104.45,102.05 F1.2
VBAT: F1.1 J1.1 J1.2 | length 12.8
  Top Layer w0.65: J1.2 J1.1 105.083,112.448 107.806,109.725 108.525,109.725 109.6,108.65 F1.1
VFB: IC1.4 Rfbb.1 Rfbt.2 | length 5.6
  Top Layer w0.3: Rfbt.2 Rfbb.1 87.741,109.613 87.741,108.982 87.923,108.8 89.2,108.8 89.45,108.55 IC1.4
VIB: J3.2 R2.1 | length 9.4
  Top Layer w0.25: J3.2 103.076,74.776 R2.1
Vin: Cin1.1 Cin2.1 D2.1 IC1.3 IC1.5 | length 17.6
  Top Layer w0.3: IC1.5 88.5,106.355 89.3,105.555 89.3,105.1 IC1.3 89.45,104.625 90.4,103.675 90.4,103.5
  Top Layer w0.65: 90.4,103.5 91.4,102.5 93.4,102.5 93.827,102.927 Cin2.1 Cin1.1 98.115,107.4 D2.1
pads on no net: ANT.2 IC2.2 IC2.3 IC2.4 IC2.5 IC2.9 IC2.10 IC2.13 IC2.14 IC2.15 IC2.16 IC2.17 IC2.18 IC2.19 IC2.25 IC2.29 IC2.30 IC2.31 IC2.35 IC2.36 IC2.37 IC2.38 IC2.39 IC2.40 IC2.42 IC2.43 IC2.44 IC2.45 IC2.46 J1.MH1 J1.MH2 J1.MH3 J2. U1.8 U1.9 U1.10 U1.11 U1.12 U1.14 U1.15 U1.18 U1.21 U1.22 U1.25 U1.27 U2.2 U2.3 U2.4 U2.5 U2.6 U2.7 U2.14 U2.15 U2.16 U2.17 U2.19 U2.21 U2.22

## Polygon pours and split planes (outlines as drawn)
3V3 on Top Layer "3V3_L01_P009" (solid, pour order 9): 111.35,122.3 112.6,121.05 112.6,119.6 113,119.2 135.6,119.2 136.5,120.1 136.4,120.1 136.5,120.2 136.5,122.9 136.5,124.6 136.1,125 80.5,125 80,124.5 80,68.6 80.7,67.9 104.9,67.9 104.9,70.7 91.9,70.7 91.093,71.507 91.093,80.707 90.6,81.2 84,81.2 82.9,82.3 82.9,93.4 84.5,95 89.9,95 90.7,94.2 90.7,89.2 91.6,88.3 95.6,88.3 95.8,88.5 95.8,89.1 95.7,89.2 94.6,89.2 93.9,89.9 92,89.9 91.75,90.15 91.75,93.65 93.1,95 97.1,95 97.7,95.6 97.7,97.4 96.4,98.7 87.9,98.7 87.3,99.3 87.3,102.7 87.1,102.9 84.8,102.9 84.4,103.3 84.4,107.6 85.3,108.5 85.3,110.5 86.5,111.7 86.5,122 86.8,122.3
GND on Top Layer "GND_L01_P007" (solid, pour order 7): 95.7,90.5 95.6,90.4 93.6,90.4 93.3,90.1 91.8,90.1 91.7,90.2 91.7,91.5 93.7,93.5 96.1,93.5 96.2,93.4 96.2,91.6 95.7,91.1
3V3 on Top Layer "3V3_L01_P006" (solid, pour order 6): 109.6,74.7 109.8,74.9 109.8,75.6 108.4,77 108.4,81 107.2,82.2 107.2,83 105,85.2 103.2,85.2 103.1,85.1 103.1,84.9 104.6,83.4 105.8,83.4 106,83.2 106,82 106.8,81.2 106.8,76.7 106.825,76.7 108.829,74.695 108.834,74.7
GND on Top Layer "GND_L01_P002" (solid, pour order 2): 92.6,83 92.6,78.1 96.7,74 101.3,74 101.8,74.5 101.7,74.6 101.7,78.5 99.8,80.4 99.8,81.1 97.6,83.3 92.9,83.3
GND on Top Layer "GND_L01_P003" (solid, pour order 3): 87.6,120.1 87.6,112 88.1,111.5 88.1,109.4 88.2,109.3 90.3,109.3 91.4,108.2 91.4,103.7 91.5,103.6 92.7,103.6 92.9,103.8 92.9,108 93.5,108.6 102.3,108.6 102.3,105.9 102.5,105.7 105,105.7 105.3,106 105.3,108.6 101,112.9 101,117.2 100.6,117.6 93.9,117.6 90.9,120.6 88.1,120.6
GND on Bottom Layer "GND_L02_P012" (solid, pour order 12): 114.6,89.1 138.1,89.1 138.1,125.3 79,125.3 79,67.9 114.6,67.9